# EAGLE board caretaker-remotecontrol (EAGLE 6.5.0)
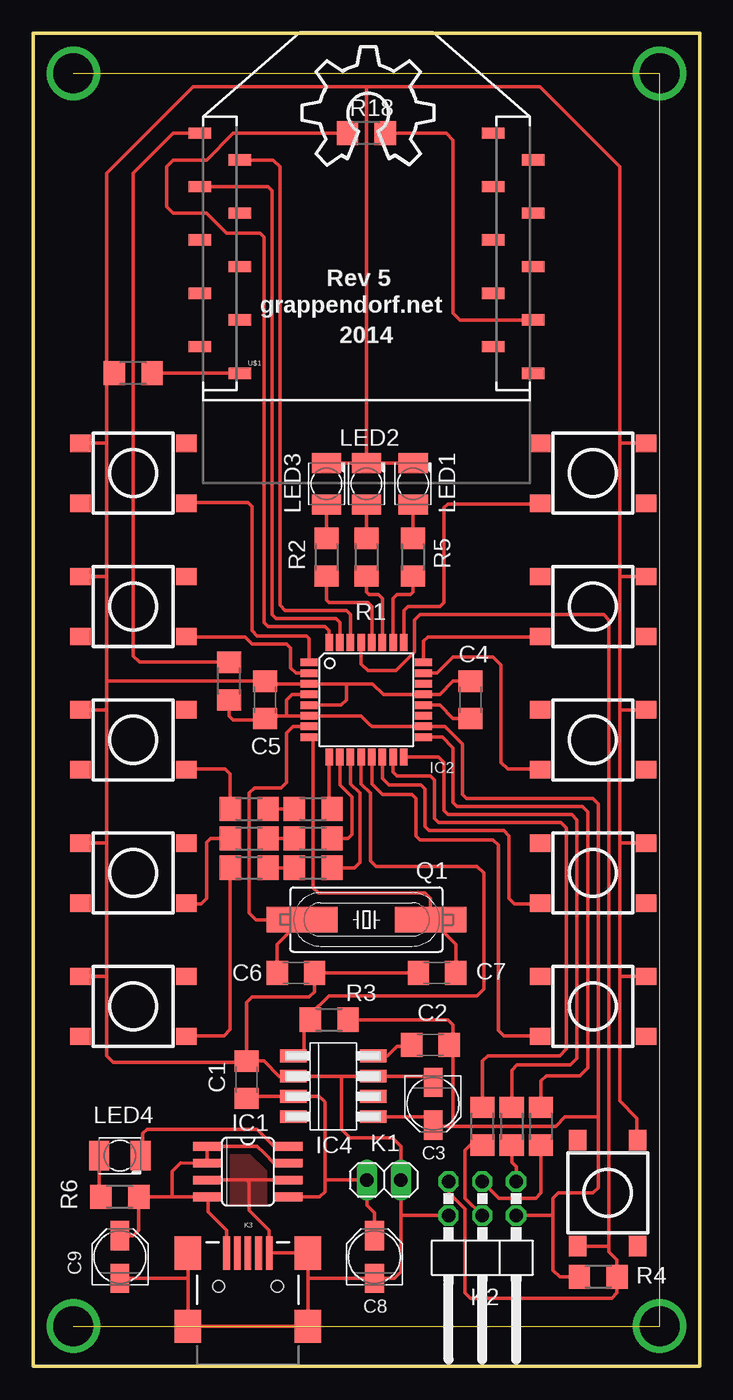
[diagram p0: board, top side]

Size 50 x 100 mm. Coordinates in mm from the lower left corner, seen from the top.
Outline: 0,0 50,0 50,100 0,100 0,0
Copper layers (1*16): Top 0.035mm / dielectric 1.5mm / Bottom 0.035mm
Design rules "default": minimum track width 10mil, minimum drill 24mil, track to track 8mil, track to pad 8mil, pad to pad 8mil, via to via 8mil, smd to smd 8mil, copper to edge 40mil, drill to drill 8mil, minimum pad ring 10mil, minimum via ring 8mil, stop-mask expansion 4mil, vias tented up to drill 0mil, thermal gap 10mil

## Footprints (pad centres in the part's own frame; a part is rotated, then mirrored left to right if it is on the bottom)
C1206 = smd 1.6 x 1.8: 1 -1.4,0; 2 1.4,0
PANASONIC_B = smd 2.2 x 1.4: + 1.6,0; - -1.6,0
SO08 = smd 0.66 x 2.032: 1 -1.905,-3.073; 2 -0.635,-3.073; 3 0.635,-3.073; 4 1.905,-3.073; 5 1.905,3.073; 6 0.635,3.073; 7 -0.635,3.073; 8 -1.905,3.073
TQFP32-08 = smd 1.27 x 0.559: 1 -4.293,2.8; 2 -4.293,2; 3 -4.293,1.2; 4 -4.293,0.4; 5 -4.293,-0.4; 6 -4.293,-1.2; 7 -4.293,-2; 8 -4.293,-2.8; 17 4.293,-2.8; 18 4.293,-2; 19 4.293,-1.2; 20 4.293,-0.4; 21 4.293,0.4; 22 4.293,1.2; 23 4.293,2; 24 4.293,2.8 | smd 0.559 x 1.27: 9 -2.8,-4.293; 10 -2,-4.293; 11 -1.2,-4.293; 12 -0.4,-4.293; 13 0.4,-4.293; 14 1.2,-4.293; 15 2,-4.293; 16 2.8,-4.293; 25 2.8,4.293; 26 2,4.293; 27 1.2,4.293; 28 0.4,4.293; 29 -0.4,4.293; 30 -1.2,4.293; 31 -2,4.293; 32 -2.8,4.293
SM8 = smd 0.95 x 2: 1 -2.28,-3; 2 -0.76,-3; 3 0.76,-3; 4 2.28,-3; 5 2.28,3; 6 0.76,3; 7 -0.76,3; 8 -2.28,3
1X02 = drill 1.016 long: 1 -1.27,0; 2 1.27,0
2X03/90 = drill 1.016 octagon: 1 -2.54,-6.35; 2 -2.54,-3.81; 3 0,-6.35; 4 0,-3.81; 5 2.54,-6.35; 6 2.54,-3.81
USB-MINIB = smd 2.5 x 0.5: D+ 2.5,0; D- 2.5,0.8; GND 2.5,-1.6; ID 2.5,-0.8; VBUS 2.5,1.6 | smd 2.5 x 2: MTN1 -3,4.5; MTN2 2.5,4.5; MTN3 -3,-4.5; MTN4 2.5,-4.5 | hole 0.9: 0,2.2; 0,-2.2
KA-3528ASYC = smd 1.5 x 2.2: A -1.55,0; C 1.55,0
HC49UP = smd 5.334 x 1.93: 1 -4.826,0; 2 4.826,0
R1206 = smd 1.6 x 1.803: 1 -1.422,0; 2 1.422,0
TACTILE_SWITCH_TALL = smd 1.55 x 1.3: A1 -3.975,-2.25; A2 3.975,-2.25; B1 -3.975,2.25; B2 3.975,2.25
WIFLY-SMD = smd 1.7 x 0.85: 1 -12.5,20; 2 -9.5,18; 3 -12.5,16; 4 -9.5,14; 5 -12.5,12; 6 -9.5,10; 7 -12.5,8; 8 -9.5,6; 9 -12.5,4; 10 -9.5,2; 11 12.5,2; 12 9.5,4; 13 12.5,6; 14 9.5,8; 15 12.5,10; 16 9.5,12; 17 12.5,14; 18 9.5,16; 19 12.5,18; 20 9.5,20

## Placement (x,y rotation side)
C1  100n  [C1206]  16,21.5 90 top
C2  10p  [C1206]  29.8,24.1 0 top
C3  1u/16V  [PANASONIC_B]  30,19.7 270 top
C4  100n  [C1206]  32.8,50 90 top
C5  100n  [C1206]  17.4,50 90 top
C6  22p  [C1206]  19.7,29.5 180 top
C7  22p  [C1206]  30.3,29.5 0 top
C8  10u/16V  [PANASONIC_B]  25.6,8.2 90 top
C9  10u/16V  [PANASONIC_B]  6.5,8.2 90 top
IC1  MAX1811N  [SO08]  16.1,14.6 270 top
IC2  ATMEGA168  [TQFP32-08]  25,50 0 top
IC4  ZLDO330  [SM8]  22.5,21 270 top
K1  BAT  [1X02]  26.3,13.97 0 top
K2  ISP  [2X03/90]  33.7,7.5 180 top
K3  USB-MINIB-5PIN  [USB-MINIB]  16.1,6 90 top
LED1  [KA-3528ASYC]  28.5,66.2 90 top
LED2  [KA-3528ASYC]  25,66.2 90 top
LED3  [KA-3528ASYC]  22,66.2 90 top
LED4  [KA-3528ASYC]  6.5,15.8 0 top
LOGO1  OSHW_LOGO_10MILX0350-NT  [OSHW_10X350_NOTEXT]  20.18,90.12 0 top
Q1  16MHz  [HC49UP]  25,33.5 180 top
R1  180  [R1206]  25,60.7 90 top
R2  180  [R1206]  22,60.7 90 top
R3  100k  [R1206]  22.2,26 180 top
R4  10k  [R1206]  42.4,6.7 0 top
R5  180  [R1206]  28.5,60.7 90 top
R6  1k  [R1206]  6.5,12.7 0 top
R7  0  [R1206]  21,41.8 180 top
R8  0  [R1206]  16.2,41.8 180 top
R9  0  [R1206]  21,39.6 180 top
R10  0  [R1206]  16.2,39.6 180 top
R11  0  [R1206]  21,37.4 180 top
R12  0  [R1206]  16.2,37.4 180 top
R13  0  [R1206]  7.5,74.5 0 top
R14  0  [R1206]  14.7,51.4 270 top
R15  0  [R1206]  35.9,18 90 top
R16  0  [R1206]  38.1,18 90 top
R17  0  [R1206]  33.7,18 270 top
R18  0  [R1206]  25,92.5 0 top
RESET  [TACTILE_SWITCH_TALL]  43.1,13 90 top
S1  [TACTILE_SWITCH_TALL]  7.5,67 0 top
S2  [TACTILE_SWITCH_TALL]  7.5,57 0 top
S3  [TACTILE_SWITCH_TALL]  7.5,47 0 top
S4  [TACTILE_SWITCH_TALL]  7.5,37 0 top
S5  [TACTILE_SWITCH_TALL]  7.5,27 0 top
S6  [TACTILE_SWITCH_TALL]  42,67 0 top
S7  [TACTILE_SWITCH_TALL]  42,57 0 top
S8  [TACTILE_SWITCH_TALL]  42,47 0 top
S9  [TACTILE_SWITCH_TALL]  42,37 0 top
S10  [TACTILE_SWITCH_TALL]  42,27 0 top
U$1  WIFLY-SMD  [WIFLY-SMD]  25,72.5 0 top

## Library data of the parts
C1-C9 R1-R18 = rcl
IC1 IC4 U$1 = grapelabs
IC2 = atmega8
K1 K2 = pinhead
K3 = SparkFun
LED1-LED4 = led
LOGO1 = OSHW
Q1 = crystal
RESET S1-S10 = grapelabs-switches

## Nets
+3V3: C2.2 C3.+ C5.1 IC2.4 IC2.6 IC2.18 IC4.5 K2.2 R3.1 R4.1 R14.2
BAT: C1.1 C8.+ IC1.5 IC4.3 K1.1
GND: C1.2 C3.- C4.2 C5.2 C6.1 C7.1 C8.- C9.- IC1.3 IC1.6 IC2.3 IC2.5 IC2.21 IC4.2 IC4.7 K1.2 K2.6 K3.GND K3.MTN1 K3.MTN2 K3.MTN3 K3.MTN4 LED1.C LED2.C LED3.C R13.1 RESET.A2 S1.B1 S2.B1 S3.B1 S4.B1 S5.B1 S6.B2 S7.B2 S8.B2 S9.B2 S10.B2
LED1: IC2.26 R5.1
LED2: IC2.27 R1.1
LED3: IC2.28 R2.1
LOWBAT: IC2.12 IC4.1 R3.2
MISO: IC2.16 R15.2
MOSI: IC2.15 R17.1
N$1: C9.+ IC1.1 IC1.2 IC1.4 IC1.7 K3.VBUS R6.2
N$2: C4.1 IC2.20
N$3: C6.2 IC2.7 Q1.2
N$4: C7.2 IC2.8 Q1.1
N$6: LED2.A R1.2
N$7: LED3.A R2.2
N$9: LED4.A R6.1
N$10: LED1.A R5.2
N$12: IC1.8 LED4.C
N$15: C2.1 IC4.8
N$16: R8.2 S3.A2
N$17: R10.2 S4.A2
N$18: R12.2 S5.A2
N$19: R7.2 R8.1
N$20: R9.2 R10.1
N$21: R11.2 R12.1
N$22: R13.2 U$1.10
N$23: R14.1 U$1.1
N$24: K2.1 R15.1
N$25: K2.3 R16.1
N$26: K2.4 R17.2
N$27: R18.2 U$1.13
RESET: IC2.29 K2.5 R4.2 RESET.B1
RXD: IC2.30 U$1.2
SCK: IC2.17 R16.2
SW1: IC2.1 S1.A2
SW2: IC2.2 S2.A2
SW3: IC2.9 R7.1
SW4: IC2.10 R9.1
SW5: IC2.11 R11.1
SW6: IC2.25 S6.A1
SW7: IC2.24 S7.A1
SW8: IC2.23 S8.A1
SW9: IC2.14 S9.A1
SW10: IC2.13 S10.A1
TXD: IC2.31 U$1.3
WIFLYSLEEP: IC2.32 R18.1

## Tracks (layer width: path | path; a pad name or v marks a point on that pad's centre or on a via)
+3V3
  Top 0.254: C5.1 17.02,48.72 | 29.52,18.68 C3.+ | 19,48.8 IC2.6 24.6,48.8 25.2,48.2 25.4,48 IC2.18 30.9,48 32.2,46.7 32.2,42.9 32.5,42.6 42,42.6 42.4,42.2 42.4,18.7 | 19,48.8 17.2,48.8 C5.1 | IC2.4 19.4,50.4 19,50 19,48.8 | IC4.5 29.48,18.72 C3.+ | R14.2 14.7,48.8 15,48.5 17.3,48.5 C5.1 | R3.1 31.1,26 31.5,25.6 31.5,24.2 C2.2 31.5,23.8 31.5,18 | C3.+ 30.1,18.1 30.2,18 31.5,18 | 42.4,18.7 42.4,13.4 42,13 39.4,13 39,12.6 39,10.3 | 39,10.3 39,7.2 39.5,6.7 R4.1 | K2.2 38.99,11.31 39,10.3 | 31.5,18 39.2,18 39.9,18.7 42.4,18.7
  Top 0.406: 31.7,24.32 C2.2
BAT
  Top 0.254: C8.+ 25.6,11.5 25.04,12.06 K1.1 21.93,13.97 21.9,14 | C1.1 16.14,20.24 IC4.3 21.46,20.24 21.8,19.9 21.9,19.8 21.9,14 | IC1.5 21.5,12.7 21.9,13.1 21.9,14
  Top 0.406: 16.15,20.2 C1.1
GND
  Top 0.254: 23.5,51.19 IC2.3 17.2,51.2 C5.2 5.5,51.4 | 23.5,51.19 25.47,51.19 26.27,50.39 IC2.21 30.5,50.4 31.5,51.4 C4.2 | IC2.5 23.09,49.59 23.5,49.99 23.5,51.19 | 16,13.97 16.14,13.97 16.15,13.96 IC1.6 | 16,13.97 IC1.3 | 29.68,21.71 C3.- 29.64,21.76 IC4.7 23.1,21.76 | LED3.C LED2.C | LED2.C LED1.C | 5.5,59.4 5.5,51.4 | 5.5,51.4 5.5,49.4 | 5.5,49.4 5.5,39.3 | 5.5,39.3 5.5,29.3 | 5.5,29.3 5.5,23.3 6,22.8 15.9,22.8 C1.2 | S2.B1 5.35,59.25 5.5,59.4 | S3.B1 5.35,49.25 5.5,49.4 | S4.B1 5.45,39.25 5.5,39.3 | S5.B1 5.45,29.25 5.5,29.3 | 44,59.3 44,49.3 | 44,49.3 44,43.4 44,39.4 44,39.3 | 45.92,29.2 S10.B2 44.05,29.25 44,29.3 | S8.B2 44.05,49.25 44,49.3 | S7.B2 44.05,59.25 44,59.3 | S9.B2 44.05,39.25 44,39.3 | 20.6,6.6 K3.MTN4 K3.GND 17.7,10.2 16.2,11.7 16.2,13.77 16,13.97 | 20.6,6.6 K3.MTN3 K3.MTN1 11.6,6.6 | 20.6,6.6 C8.- 27.1,6.6 27.57,7.08 27.57,11.3 | 27.57,11.3 K1.2 27.57,16.51 26.94,17.14 23.77,17.14 23.13,17.78 23.13,21.73 23.1,21.76 | 11.6,6.6 K3.MTN2 | C9.- 11.6,6.6 | 23.1,21.76 IC4.2 18.44,21.76 17.3,22.9 C1.2 | K2.6 27.59,11.31 27.57,11.3 | C7.1 C6.1 | C6.1 21.1,29.1 | 5.5,59.4 5.5,69.3 | S1.B1 5.45,69.25 5.5,69.3 | 45.92,69.3 S6.B2 44.05,69.25 44,69.2 | 44,59.3 44,69.2 | 44,69.2 44,90 38,96 25,96 | 25,96 12,96 5.5,89.5 5.5,74.58 R13.1 5.5,74.42 5.5,69.3 | LED2.C 25,96 | 44,39.3 44,29.3 | 44,29.3 44,19.9 45.3,18.6 45.3,17.02 RESET.A2 | C1.2 16,27.3 16.4,27.7 20.7,27.7 21.1,28.1 C6.1
  pour Top (isolate 0.406): 14.88,15.88 14.88,12.11 17.41,12.11 17.41,14.61 16.14,15.88
LED1
  Top 0.254: IC2.26 27,57.6 27.3,57.9 28.3,57.9 28.5,58.1 R5.1
LED2
  Top 0.254: IC2.27 26.2,57.6 25.9,57.9 25.2,57.9 25,58.1 R1.1
LED3
  Top 0.254: IC2.28 25.4,57 25.1,57.3 22.2,57.3 22,57.5 R2.1
LOWBAT
  Top 0.254: IC4.1 20.32,23.23 20.32,25.4 20.8,25.4 R3.2 20.78,26.38 22.2,27.8 33.3,27.8 33.8,28.3 33.8,37 33.3,37.5 25.7,37.5 25.3,37.9 25.3,38.4 25.3,43 24.6,43.7 IC2.12
MISO
  Top 0.254: IC2.16 30.39,45.71 30.8,45.3 30.8,41.7 31.1,41.4 40.4,41.4 40.8,41 40.8,23.1 40.3,22.6 36.3,22.6 35.9,22.2 R15.2
MOSI
  Top 0.254: IC2.15 27,44.6 27.3,44.3 29.8,44.3 30.1,44 30.1,41.1 30.4,40.8 39.6,40.8 40,40.4 40,23.8 39.5,23.3 34.1,23.3 33.7,22.9 R17.1
N$1
  Top 0.254: K3.VBUS 14.5,10.2 13.1,11.6 13.1,12.67 IC1.4 10.4,12.7 | IC1.7 18.07,15.23 17.3,16 16.8,16.5 IC1.1 IC1.2 11.06,15.24 10.43,14.61 10.43,12.72 10.4,12.7 | C9.+ 7.5,9.8 7.9,10.2 7.9,12.68 R6.2 10.4,12.7
N$2
  Top 0.254: IC2.20 30.5,49.6 31.5,48.6 C4.1
N$3
  Top 0.254: C6.2 18.3,31.63 Q1.2 16.7,33.5 16.2,34 16.2,43 16.6,43.4 18.6,43.4 19,43.8 19,47.5 19.5,48 IC2.7
N$4
  Top 0.254: C7.2 31.7,31.63 Q1.1 29.8,33.53 29.8,35.1 29.4,35.5 21.4,35.5 21,35.9 21,46.91 IC2.8
N$5  (via drill 3)
  other vias: 3,97
N$6
  Top 0.254: LED2.A R1.2
N$7
  Top 0.254: LED3.A R2.2
N$8  (via drill 3)
  other vias: 47,97
N$9
  Top 0.254: LED4.A 4.95,12.83 R6.1
N$10
  Top 0.254: LED1.A R5.2
N$11  (via drill 3)
  other vias: 47,3
N$12
  Top 0.254: IC1.8 18.05,16.51 16.78,17.78 8.53,17.78 8.21,17.46 8.21,16.55 8.53,16.23 LED4.C
N$13  (via drill 3)
  other vias: 3,3
N$14  (via drill 0.6)  (3 unrouted)
  other vias: 3,3 3,97 47,3 47,97
N$15
  Top 0.254: IC4.8 26.58,23.28 27.3,24 28.3,24 C2.1
N$16
  Top 0.254: R8.2 14.78,44.42 14.4,44.8 11.53,44.8 S3.A2
N$17
  Top 0.254: R10.2 14.6,39.6 13.3,39.6 13,39.3 13,35.1 12.6,34.7 11.53,34.7 S4.A2 11.5,34.77
N$18
  Top 0.254: R12.2 14.78,25.28 14.3,24.8 11.53,24.8 S5.A2
N$19
  Top 0.254: R7.2 R8.1
N$20
  Top 0.254: R9.2 R10.1
N$21
  Top 0.254: R11.2 R12.1
N$22
  Top 0.254: U$1.10 R13.2
N$23
  Top 0.254: R14.1 7.98,52.82 7.5,53.3 7.5,89.5 10.5,92.5 U$1.1
N$24
  Top 0.254: 36.24,16.14 R15.1 35.9,15.3 36.24,14.96 K2.1
N$25
  Top 0.254: R16.1 38.1,13 37.7,12.6 34.95,12.6 K2.3
N$26
  Top 0.254: K2.4 32.4,12.61 32.4,16.2 32.8,16.6 33.68,16.6 R17.2
N$27
  Top 0.254: R18.2 31,92.5 31.5,92 31.5,79 32,78.5 U$1.13
RESET
  Top 0.254: IC2.29 24.6,52.7 25.1,52.2 27.2,52.2 28.6,53.6 28.6,56 29,56.4 42.8,56.4 43.2,56 43.2,9 | RESET.B1 40.88,9 43.2,9 | 43.5,6.38 R4.2 | K2.5 31.2,13.81 31.2,13 32.4,11.8 32.4,5.5 32.8,5.1 43.4,5.1 43.8,5.5 43.8,6.68 R4.2 | 43.2,9 43.2,8.6 43.8,8 43.8,6.72 R4.2
RXD
  Top 0.254: IC2.30 23.8,56.4 23.5,56.7 18.9,56.7 18.5,57.1 18.5,90 18,90.5 U$1.2
SCK
  Top 0.254: IC2.17 30.7,47.2 31.5,46.4 31.5,42.3 31.8,42 41.2,42 41.6,41.6 41.6,22.4 41,21.8 38.5,21.8 38.1,21.4 R16.2
SW1
  Top 0.254: IC2.1 20.71,54.59 20.5,54.8 16.8,54.8 16.4,55.2 16.4,64.5 16.1,64.8 11.53,64.8 S1.A2
SW2
  Top 0.254: IC2.2 19.7,52 19.3,52.4 19.3,53.9 19,54.2 16.4,54.2 15.9,54.7 11.53,54.7 S2.A2
SW3
  Top 0.254: IC2.9 22.2,41.92 R7.1
SW4
  Top 0.254: IC2.10 23,43.6 23.9,42.7 23.9,39.9 23.6,39.6 R9.1
SW5
  Top 0.254: IC2.11 23.8,43.7 24.5,43 24.5,37.8 24.1,37.4 R11.1
SW6
  Top 0.254: IC2.25 27.8,56.7 28.1,57 30.5,57 30.8,57.3 30.8,64.4 31.1,64.7 37.98,64.7 S6.A1
SW7
  Top 0.254: IC2.24 29.29,54.39 29.6,54.7 37.98,54.7 S7.A1
SW8
  Top 0.254: IC2.23 30.3,52 31.5,53.2 34.5,53.2 35.1,52.6 35.1,45.3 35.6,44.8 37.98,44.8 S8.A1
SW9
  Top 0.254: IC2.14 26.2,44.1 26.7,43.6 29.1,43.6 29.4,43.3 29.4,40.5 29.7,40.2 35.3,40.2 35.7,39.8 35.7,35.1 36.1,34.7 37.98,34.7 S9.A1
SW10
  Top 0.254: IC2.13 25.4,43.7 26.2,42.9 28.4,42.9 28.7,42.6 28.7,39.8 29,39.5 34.5,39.5 34.9,39.1 34.9,25.2 35.3,24.8 37.98,24.8 S10.A1
TXD
  Top 0.254: IC2.31 23,55.8 22.7,56.1 18.2,56.1 17.9,56.4 17.9,88.2 17.6,88.5 U$1.3
WIFLYSLEEP
  Top 0.254: IC2.32 22.2,55.2 21.9,55.5 17.6,55.5 17.3,55.8 17.3,84.7 17,85 14.5,85 13,86.5 10.5,86.5 10,87 10,90 10.5,90.5 13,90.5 15,92.5 R18.1

## Text on the board
tNames: Rev 5 | grappendorf.net | 2014
bNames: CoYoHo RC